# Altium PCB AudioAmplifier.PcbDoc
Units mm, origin at the board's own origin, x right, y up, seen from the top; angles counter-clockwise.
Board outline 80 x 83 mm, 2 copper layers (Top Layer, Bottom Layer); 27 components, 21 nets, 68 pads, 0 vias.
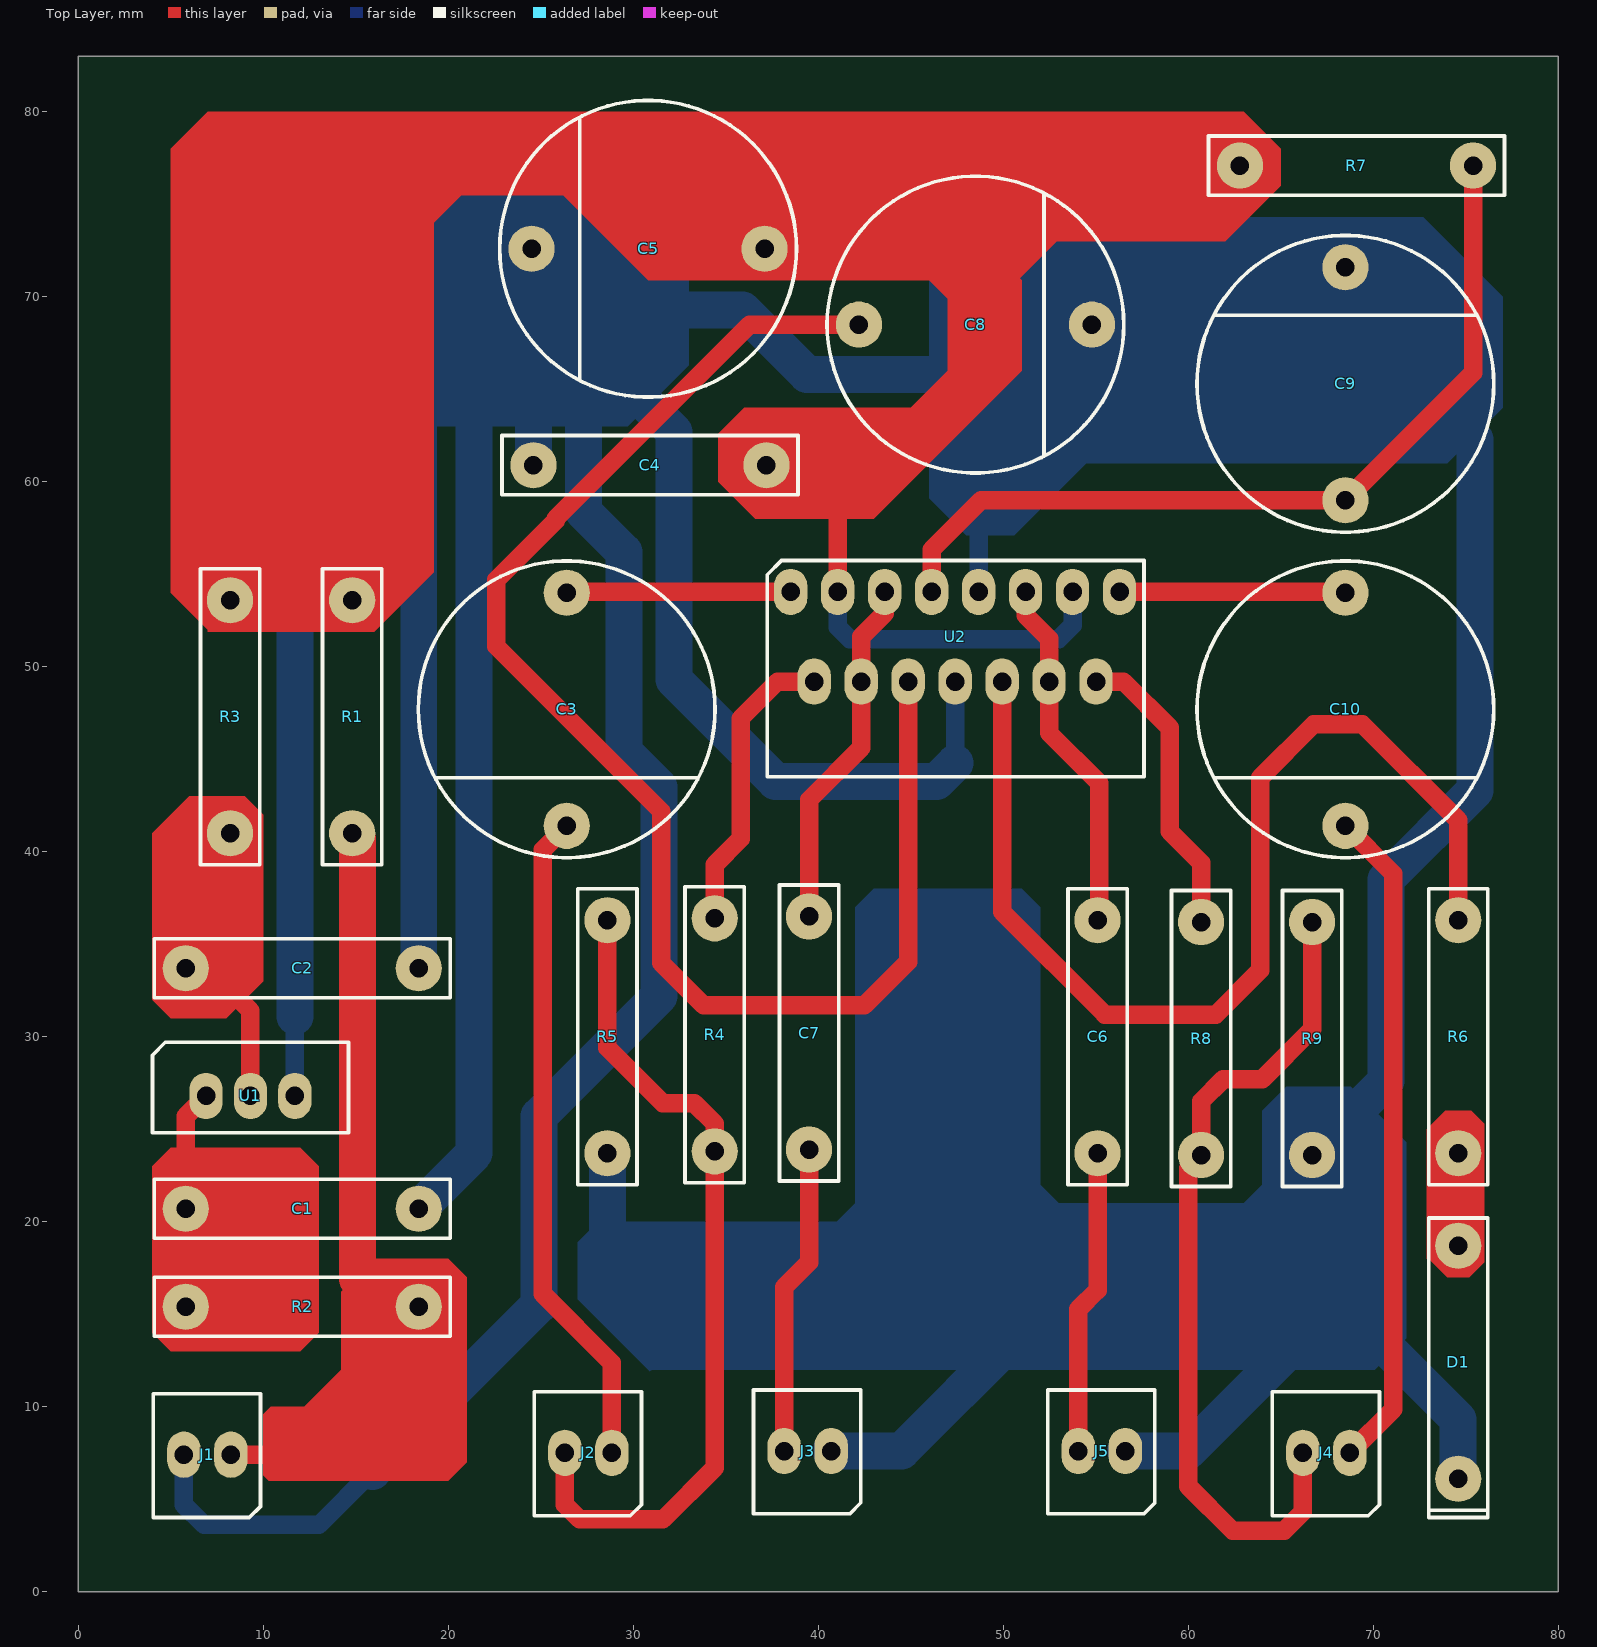
[diagram p0: Top Layer view]
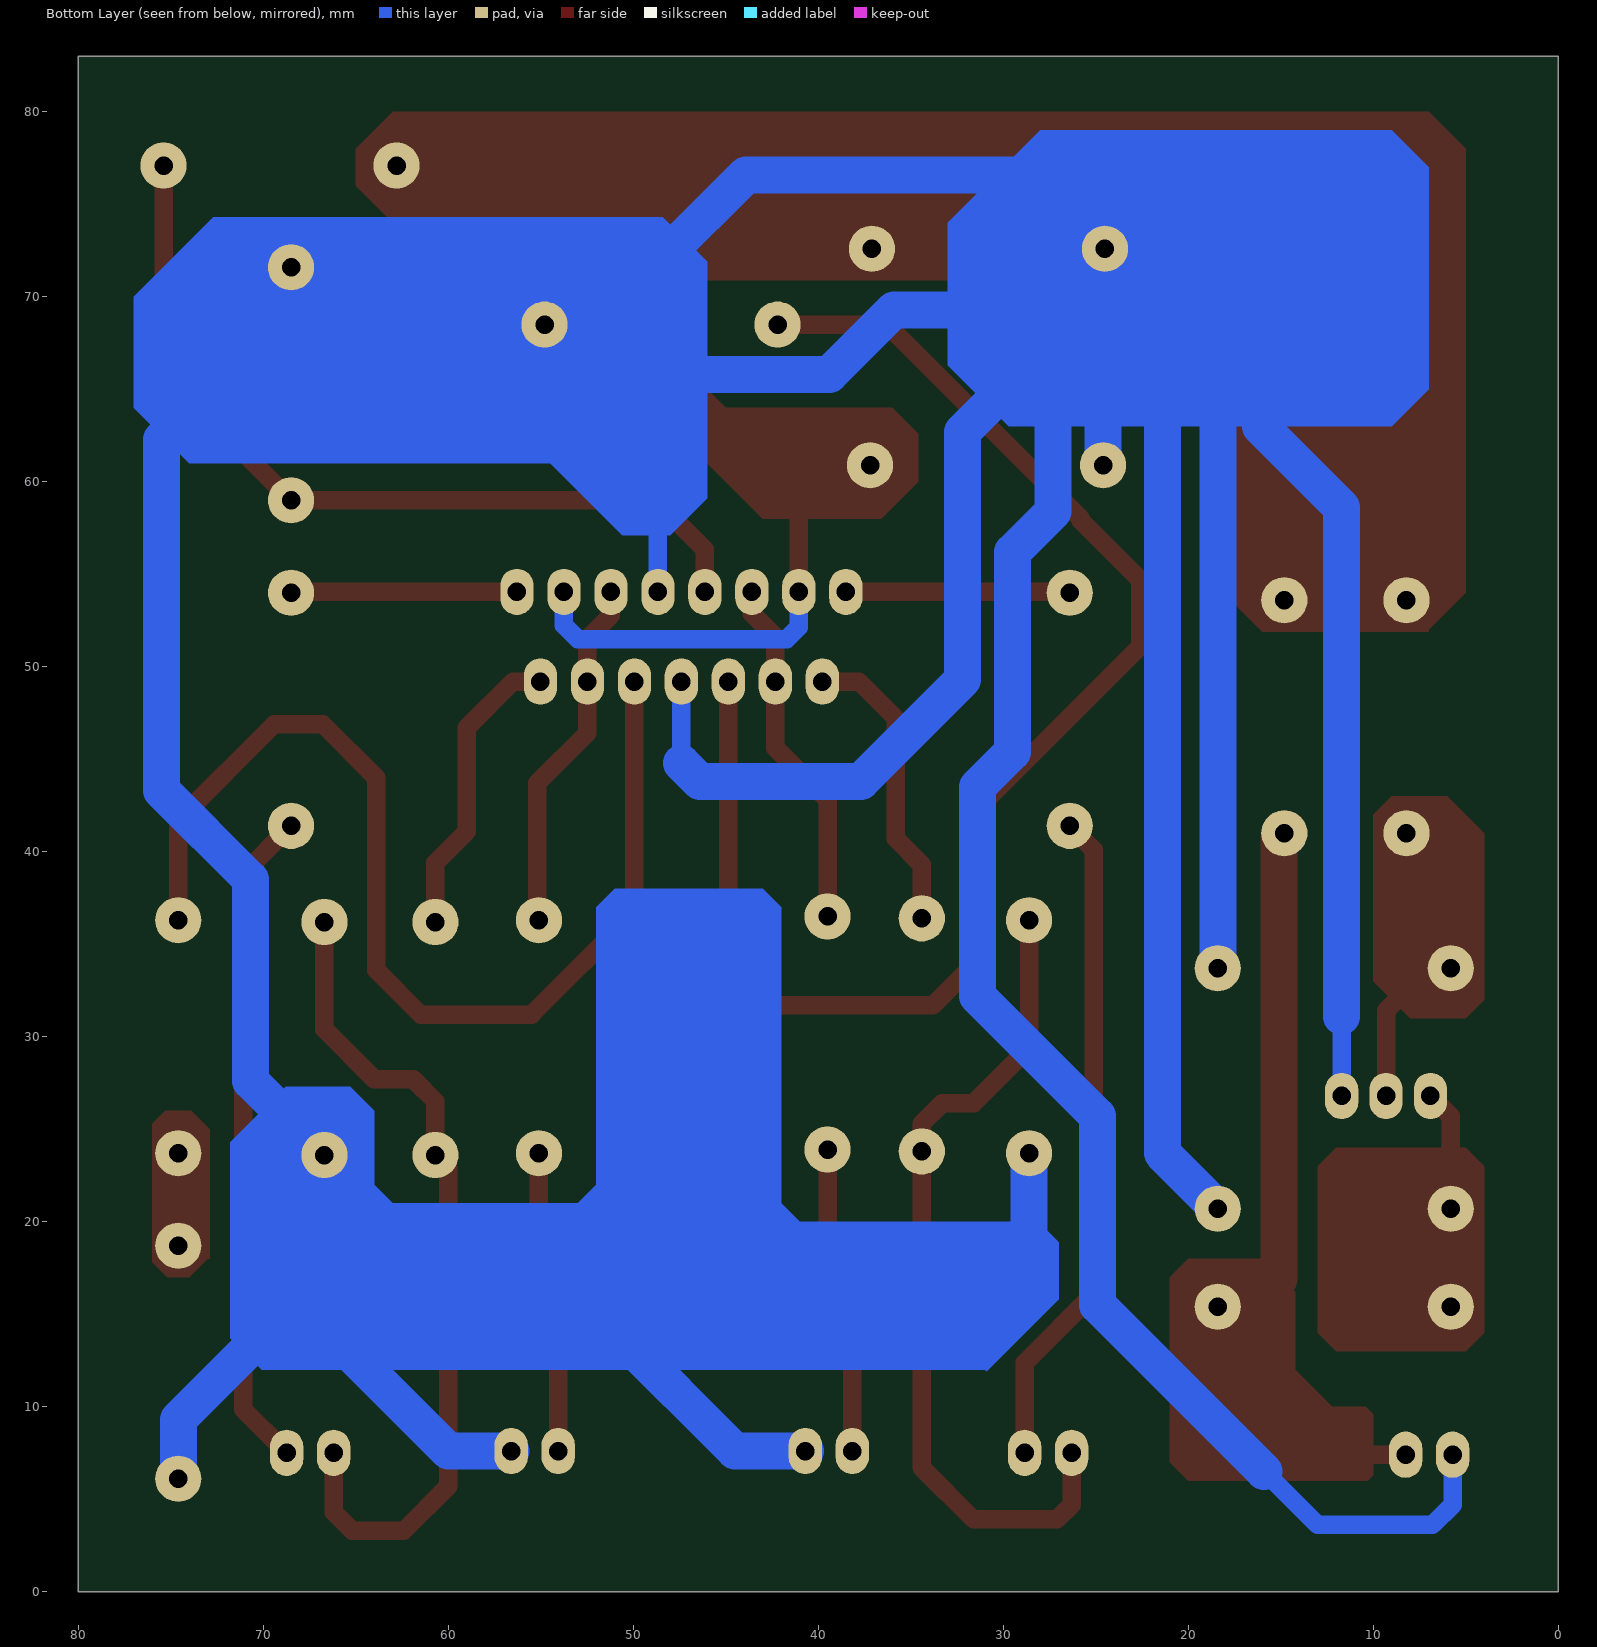
[diagram p1: Bottom Layer view, seen from below]

## Layer stack, top to bottom
Top Solder: solder mask 0.0102, Solder Resist, Dk 3.5
Top Layer: signal copper 0.0356
Dielectric 1: dielectric 0.32, FR-4, Dk 4.8
Bottom Layer: signal copper 0.0356
Bottom Solder: solder mask 0.0102, Solder Resist, Dk 3.5

## Board outline
0,0 80,0 80,83 0,83

## Design rules (kind name [scope] priority, off if disabled: settings)
Clearance [All] p1: gap=0.254
PolygonConnect [All] p1: connectstyle=Relief reliefconductorwidth=0.254 reliefentries=4 polygonreliefangle="90 Angle" airgapwidth=0.254
RoutingVias [All] p1: holewidth=0.711 width=1.27 viastyle="Through Hole" minholewidth=0.711 minwidth=1.27 maxholewidth=0.711 maxwidth=1.27
SilkToSolderMaskClearance [IsPad] p1: minsilkscreentomaskgap=0.1 clearancetoexposedcopper=TRUE
SolderMaskExpansion [All] p1: expansion=0.102
UnpouredPolygon [All] p1: allowunpoured=FALSE
Width [All] p1: maxlimit=999 minlimit=0.2 preferedwidth=0.254
28 further rules are at their usual default settings.

## Components (designator, comment, footprint, x,y, rotation, side; value= is the part's Value field where it differs from the comment)
C1 "0.33uF" "CERAMIC CAPACITOR" 18.4,20.7 r180 top
C2 "100n" "CERAMIC CAPACITOR" 5.8,33.7 r0 top
C3 "2200uF" ELECTROLYTIC_CAPACITOR 26.4,54 r270 top
C4 "100n" "CERAMIC CAPACITOR" 37.2,60.9 r180 top
C5 "1000u" ELECTROLYTIC_CAPACITOR 37.1,72.6 r180 top
C6 "470n" "CERAMIC CAPACITOR" 55.1,23.7 r90 top
C7 "470n" "CERAMIC CAPACITOR" 39.5,23.9 r90 top
C8 "47u" ELECTROLYTIC_CAPACITOR 42.2,68.5 r0 top
C9 "10u" ELECTROLYTIC_CAPACITOR 68.5,59 r90 top
C10 "2200uF" ELECTROLYTIC_CAPACITOR 68.5,54 r270 top
D1 "350-00006" LED 74.6,18.7 r270 top
J1 "1725656" 1725656 8.24,7.4 r180 top
J2 "1725656" 1725656 28.84,7.5 r180 top
J3 "1725656" 1725656 40.7,7.6 r180 top
J4 "1725656" 1725656 68.74,7.5 r180 top
J5 "1725656" 1725656 56.6,7.6 r180 top
R1 "0" Resistor 14.8,41 r90 top
R2 "0" Resistor 18.4,15.4 r180 top
R3 "0" Resistor 8.2,41 r90 top
R4 "0" Resistor 34.4,36.4 r270 top
R5 "0" Resistor 28.6,23.7 r90 top
R6 "1k" Resistor 74.6,23.7 r90 top
R7 "10k" Resistor 62.8,77.1 r0 top
R8 "0" Resistor 60.7,36.2 r270 top
R9 "0" Resistor 66.7,23.6 r90 top
U1 "L7812CV" TO-220 6.9,26.8 r0 top
U2 "STA540" Multiwatt15 38.51,54.05 r90 top

## Footprints (in the part's own frame and the unit in brackets; to place one, negate y for a bottom-side part, rotate by r counter-clockwise, add the part's x,y. Pads: shape width x height; smd on the part's side, far side on the other; paste and mask are expansions set on the pad)
1725656 [mm]
  oval 1.8x2.5 hole 1: 1(0,0) 2(2.54,0)
  silkscreen extent -1.6,-3.3 4.2,3.4, body extent -1.47,-3.2 4.07,3.3, height 8.5
"CERAMIC CAPACITOR" [mm]
  round 2.5 hole 1: 1(0,0) 2(12.6,0)
  silkscreen extent -1.7,-1.6 14.3,1.6
ELECTROLYTIC_CAPACITOR [mm]
  round 2.5 hole 1: 1(0,0) 2(12.6,0)
  silkscreen extent -1.72,-8.02 14.32,8.02
LED [mm]
  round 2.5 hole 1: 1(0,0) 2(12.6,0)
  silkscreen extent -1.5,-1.6 14.7,1.6
Multiwatt15 [mm]
  oval 2.5x1.8 hole 1: 1(0,0) 2(-4.85,-1.27) 3(0,-2.54) 4(-4.85,-3.81) 5(0,-5.08) 6(-4.85,-6.35) 7(0,-7.62) 8(-4.85,-8.89) 9(0,-10.16) 10(-4.85,-11.43) 11(0,-12.7) 12(-4.85,-13.97) 13(0,-15.24) 14(-4.85,-16.51) 15(0,-17.78)
  silkscreen extent -10,-19.1 1.7,1.27, body extent -9.6,-18.7 0.29,0.9, height 21.3
Resistor [mm]
  round 2.5 hole 1: 1(0,0) 2(12.6,0)
  silkscreen extent -1.7,-1.6 14.3,1.6
TO-220 [mm]
  oval 1.8x2.5 hole 1: 1(0,0) 2(2.4,0) 3(4.8,0)
  silkscreen extent -2.9,-2 7.7,2.9, body extent -2.7,-1.8 7.5,2.7, height 19.56

## Part data
C1: library part SR215E334MARTR2, "Multilayer Ceramic Capacitors MLCC - Leaded 50volts .33uF 20%"
C2 C4: library part K104K15X7RF5UH5, "Multilayer Ceramic Capacitors MLCC - Leaded .1uF 50volts 10% 5.0mm X7R"
C3 C10: library part UVK1H222MHD, "Aluminium Electrolytic Capacitors - Leaded 50volts 2200uF 16x31.5 20% 7.5LS"
C5: library part UVR1E102MPD1TD, "Aluminium Electrolytic Capacitors - Leaded 1000uF 25V 85c"
C6 C7: library part FK28X5R1E474K, "Multilayer Ceramic Capacitors MLCC - Leaded 0.47uF 25volts X5R +/-10%"
C8: library part RGA470M1VBK-0611G, "Aluminium Electrolytic Capacitors - Leaded 35V 47uF 105C 6.3x11mm"
C9: library part REA100M1HBK-0511P, "Aluminium Electrolytic Capacitors - Leaded 50V 10uF 20% 5x11mm"
D1: "Standard LEDs - Through Hole Red LED"
J1 J2 J3 J4 J5: "Fixed Terminal Blocks 2P 2.54mm 90DEG"
R1 R2 R3 R4 R5 R8 R9: library part SFR25000Z0000ZR500, "Metal Film Resistors - Through Hole 400mW 0 Ohm Jumper SFR55 Historical p/n"
R6: library part MFS1/2DCT52R1001F, "Metal Film Resistors - Through Hole 1/2W1K ohm 1%"
R7: library part SFR16S0001002FR500, "Metal Film Resistors - Through Hole 1/2watt 10Kohms 1%"
U1: "Linear Voltage Regulators 12V 1.5A Positive"
U2: "Audio Amplifiers 4-CH AB Audio AMP 4 X 13 W Dual/Quad"

## Nets (pads, with @x,y where several pads share a name; then routed paths per layer and width w, separated by ;. In a path a pad name is that pad's centre, name@x,y a point inside that pad or via, vN(x,y) a via of type N, cw(c..) or ccw(c..) an arc to the next point about the centre after c; other vN are vias at no path point)
+8_22V_VS: C4.1 C5.1 R1.2 R3.2 R7.1 U2.3 U2.13 | length 64.6
  Top Layer w1: R3.2@9.4,53.5 14.7,53.5 R1.2 ; C4.1 39.8,60.9 ; U2.3 41.05,59.65 39.8,60.9 ; R7.1 56.3,77.1 49.7,70.5 49.7,66.3 44.3,60.9 39.8,60.9
  Bottom Layer w1: U2.3 41.05,52.15 41.7,51.5 53,51.5 53.75,52.25 U2.13
AUD_IN_LEFT: C7.1 J3.2 | length 16.9
  Top Layer w1: J3.2 38.16,16.46 39.5,17.8 C7.1
AUD_IN_RIGHT: C6.1 J5.2 | length 16.5
  Top Layer w1: J5.2 54.06,15.26 55.1,16.3 C6.1
AUD_OUT_1: C3.1 U2.1 | length 12.2
  Top Layer w1: C3.1 26.45,54.05 U2.1@38.31,54.05 ; U2.1@38.26,54 U2.1@38.31,54.05 ; U2.1 U2.1@38.31,54.05
AUD_OUT_2: R4.1 U2.2 | length 16.2
  Top Layer w1: R4.1 34.4,39.3 35.8,40.7 35.8,47.2 37.8,49.2 U2.2
AUD_OUT_3: C10.1 U2.15 | length 12.2
  Top Layer w1: U2.15 68.45,54.05 C10.1
AUD_OUT_4: R8.1 U2.14 | length 16.2
  Top Layer w1: U2.14 56.5,49.2 59,46.7 59,41.1 60.7,39.4 R8.1
NetC1_2: C1.2 R2.2 U1.1 | length 6.6
  Top Layer w1: C1.2 5.8,25.7 U1.1
NetC2_1: C2.1 R3.1 U1.2 | length 9.1
  Top Layer w1: C2.1 7,33.7 9.3,31.4 U1.2
NetC3_2: C3.2 J2.1 | length 36
  Top Layer w1: C3.2 25.1,40.1 25.1,16.1 28.84,12.36 J2.1
NetC6_2: C6.2 U2.11 U2.12 | length 19.4
  Top Layer w1: U2.11 51.21,52.79 52.48,51.52 U2.12 52.48,46.42 55.2,43.7 55.2,36.4 C6.2
NetC7_2: C7.2 U2.4 U2.5 | length 19.2
  Top Layer w1: C7.2 39.5,42.8 42.32,45.62 U2.4 42.32,51.62 43.59,52.89 U2.5
NetC8_1: C8.1 U2.6 | length 80.2
  Top Layer w1: C8.1 36.3,68.5 25.8,58 25.8,57.9 22.6,54.7 22.6,51.1 31.5,42.2 31.5,34 33.8,31.7 42.5,31.7 44.86,34.06 U2.6
NetC9_1: C9.1 R7.2 U2.7 | length 46.7
  Top Layer w1: U2.7 46.13,56.33 48.8,59 C9.1 75.4,65.9 R7.2
NetC10_2: C10.2 J4.1 | length 36
  Top Layer w1: C10.2 71.1,38.8 71.1,9.86 J4.1
NetD1_1: D1.1 R6.1
NetJ1_1: J1.1 R1.1 R2.1 | length 32.1
  Top Layer w1: J1.1 13.7,7.4 14.8,8.5
  Top Layer w2: R1.1 15.1,40.7 15.1,16.9 15.7,16.3
NetJ2_2: J2.2 R4.2 R5.2 | length 45.4
  Top Layer w1: J2.2 26.3,4.7 27.1,3.9 31.6,3.9 34.4,6.7 R4.2 34.4,25.3 33.3,26.4 31.6,26.4 28.6,29.4 R5.2
NetJ4_2: J4.2 R8.2 R9.2 | length 45.3
  Top Layer w1: J4.2 66.2,4.3 65.2,3.3 62.4,3.3 60,5.7 60,22.9 R8.2 60.7,26.5 61.9,27.7 64,27.7 66.7,30.4 R9.2
NetR6_2: R6.2 U2.10 | length 59.6
  Top Layer w1: U2.10 49.94,36.76 55.5,31.2 61.5,31.2 63.9,33.6 63.9,44 66.8,46.9 69.4,46.9 74.6,41.7 R6.2
PGND: C1.1 C2.2 C4.2 C5.2 C8.2 C9.2 D1.2 J1.2 J3.1 J5.1 R5.1 R9.1 U1.3 U2.8 U2.9 | length 438.9
  Bottom Layer w1: J1.2 5.7,4.7 6.8,3.6 13,3.6 15.9,6.5 ; U1.3 11.7,31.1 ; 47.4,44.8 U2.8 ; U2.9 48.67,57.77
  Bottom Layer w2: 11.7,31.1 11.7,58.6 16.1,63 16.1,68.4 ; 15.9,6.5 24.9,15.5 24.9,25.7 31.4,32.2 31.4,43.5 29.5,45.4 29.5,56.2 27.3,58.4 27.3,67.6 32.2,62.7 32.2,49.3 37.7,43.8 46.4,43.8 47.4,44.8 ; C1.1 21.4,23.7 21.4,69.5 ; C2.2 18.4,66.5 ; C5.2 C5.2@24.6,72.5 ; C4.2 24.6,66.9 ; 27.2,69.3 35.9,69.3 39.4,65.8 48.8,65.8 ; R5.1 28.6,18.5 30.6,16.5 63.8,16.5 66.7,19.4 R9.1 70.7,27.6 70.7,38.5 75.5,43.3 75.5,62.3 73.2,64.6 ; 28.8,76.6 43.9,76.6 48.4,72.1 ; J3.1 44.5,7.6 50.7,13.8 ; J5.1 60,7.6 66.6,14.2 ; 63.4,63.3 63.7,63 ; 69.1,14.8 74.6,9.3 D1.2

## Other copper
Top Layer:
  region net NetJ1_1: 16,18 14.2,16.2 14.2,12 12.2,10 10.4,10 10,9.6 10,6.3 10.3,6 20,6 21,7 21,17 20,18
  region net NetC2_1: 9,43 10,42 10,33 8,31 5,31 4,32 4,41 6,43
  region net NetC1_2: 5,24 4,23 4,14 5,13 12,13 13,14 13,23 12,24
  region net NetD1_1: 73.9,26 72.9,25 72.9,18 73,18 74,17 75.2,17 76,17.8 76,25 76,25.3 75.3,26
  region net +8_22V_VS: 7,52 5,54 5,78 7,80 63,80 65,78 65,76 62,73 52.9,73 50.9,71 51,70.9 51,66 43,58 36.6,58 34.6,60 34.6,62.6 36,64 45,64 47,66 47,69.9 46,70.9 30.8,70.9 26.2,75.5 20.7,75.5 19.2,74 19.2,55.1 16,51.9 7,51.9
Bottom Layer:
  region net PGND: 28,79 33,74 33,66.3 29.7,63 9,63 7,65 7,77 9,79
  region net PGND: 48,57.1 46,59.1 46,71.9 48.4,74.3 72.7,74.3 77,70 77,64 74,61 54.5,61 50.6,57.1
  region net PGND: 43,38 42,37 42,21 41,20 28.1,20 27,18.9 27,15.8 30.9,11.9 31,12 70.1,12 71.8,13.7 71.8,24.3 68.8,27.3 65.3,27.3 64,26 64,22 63,21 53,21 52,22 52,37 51,38